# Altium PCB ArduinoUnoShield.PcbDoc
Units mil, origin at the board's own origin, x right, y up, seen from the top; angles counter-clockwise.
Board outline 2700 x 2100 mil, 2 copper layers (Top Layer, Bottom Layer); 21 components, 38 nets, 83 pads, 0 vias.
Unrouted connection lines stored in the file: 2.
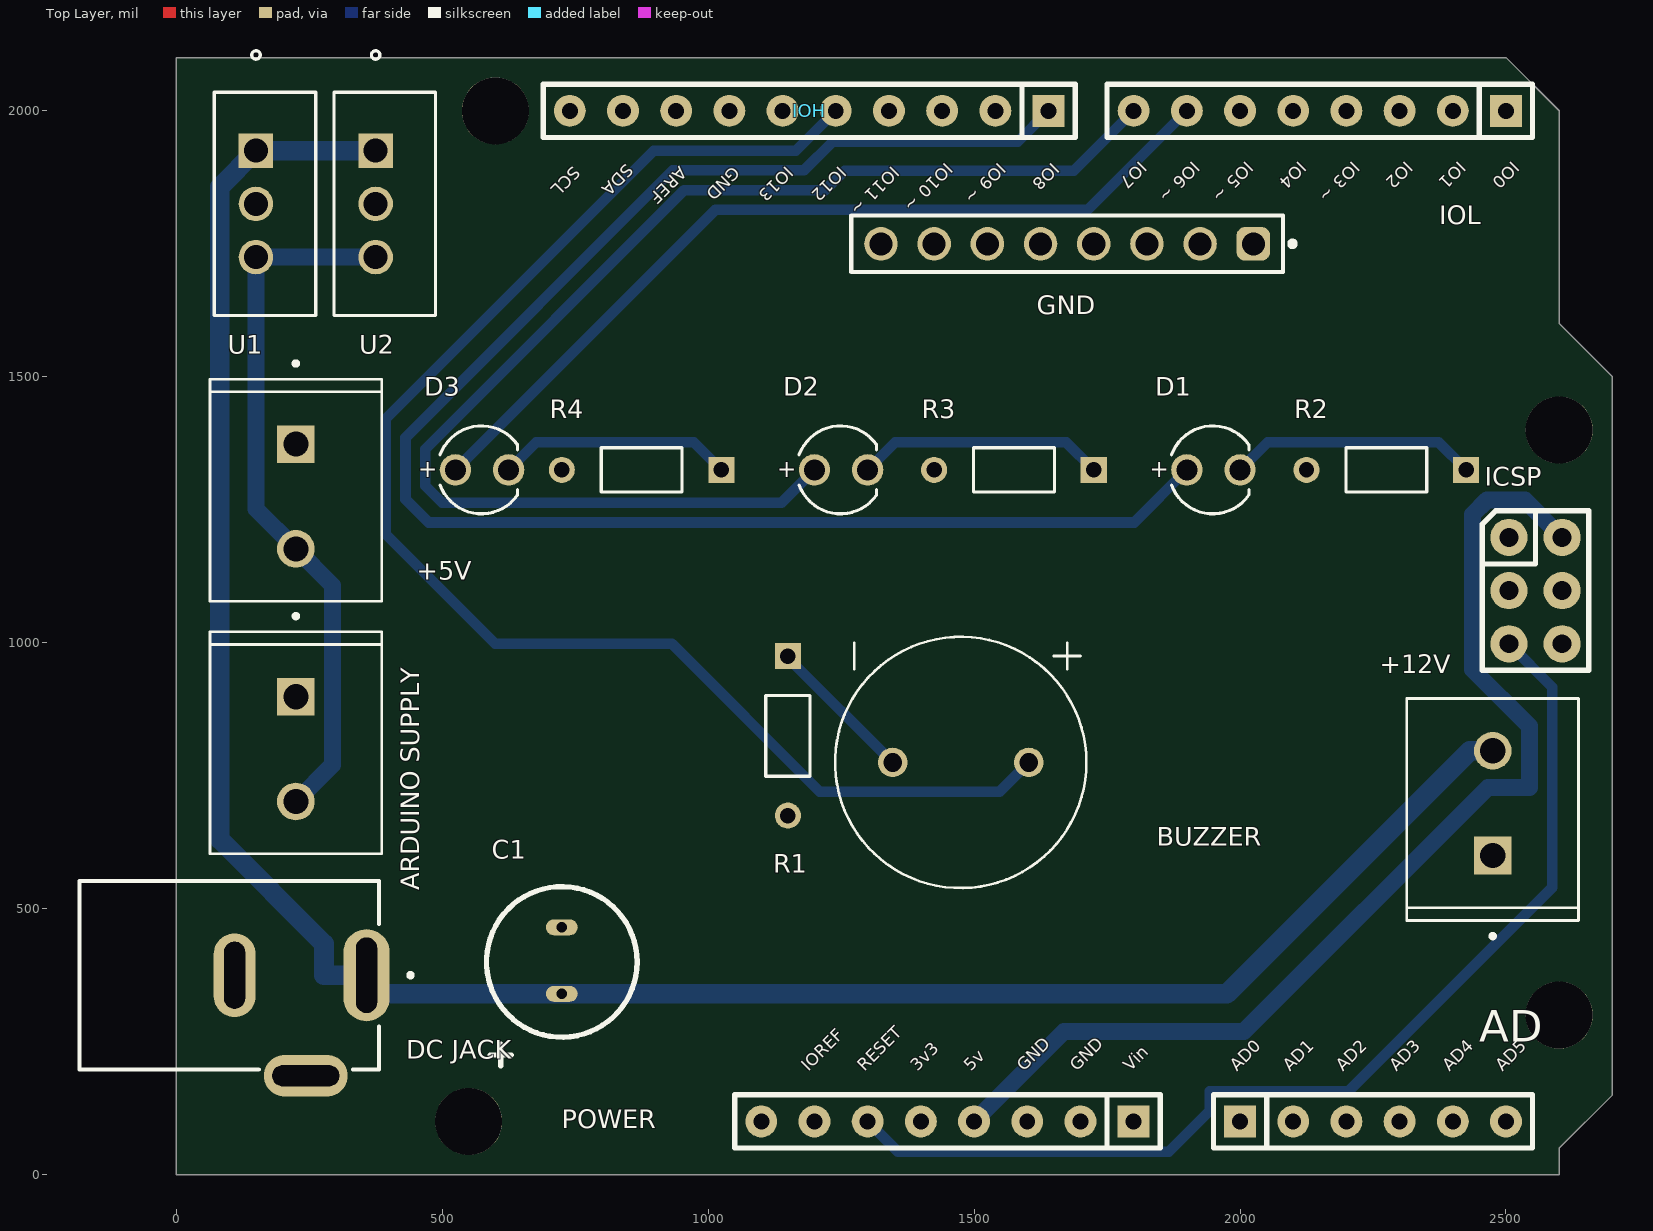
[diagram p0: Top Layer view]
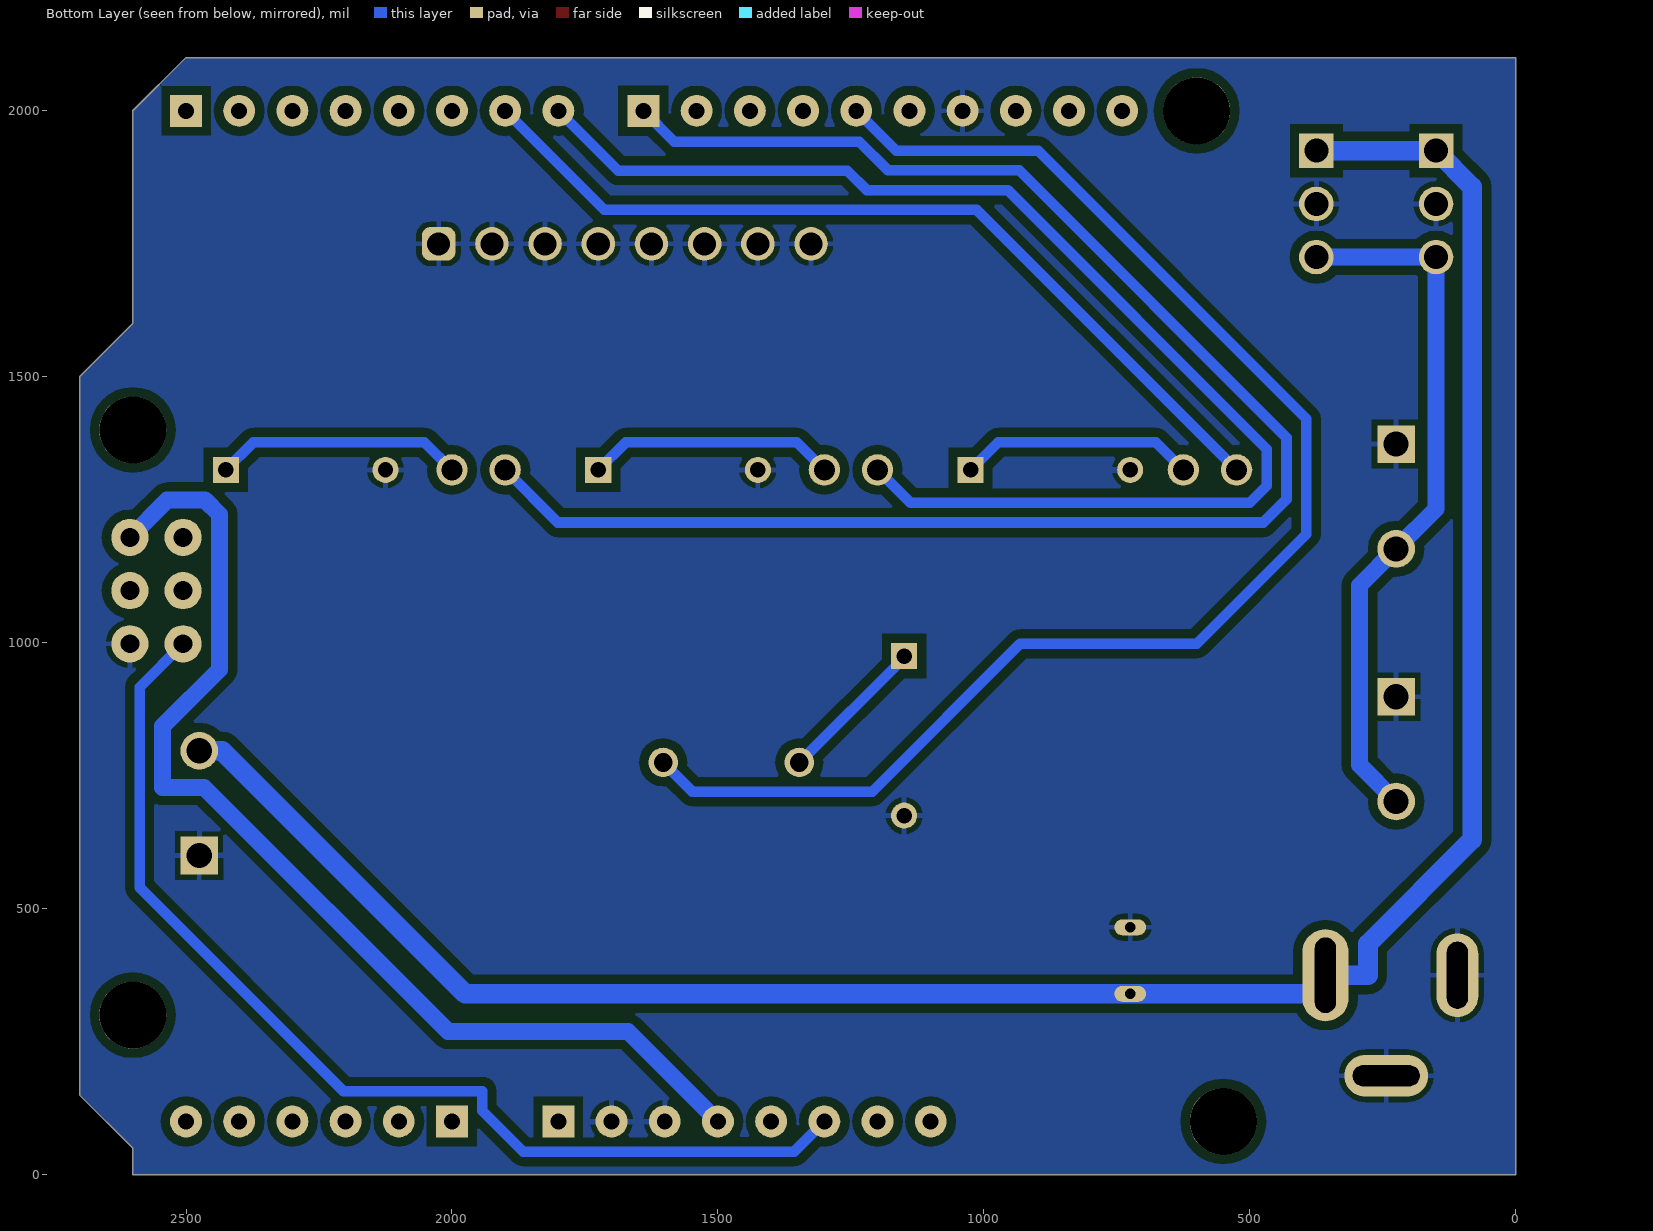
[diagram p1: Bottom Layer view, seen from below]
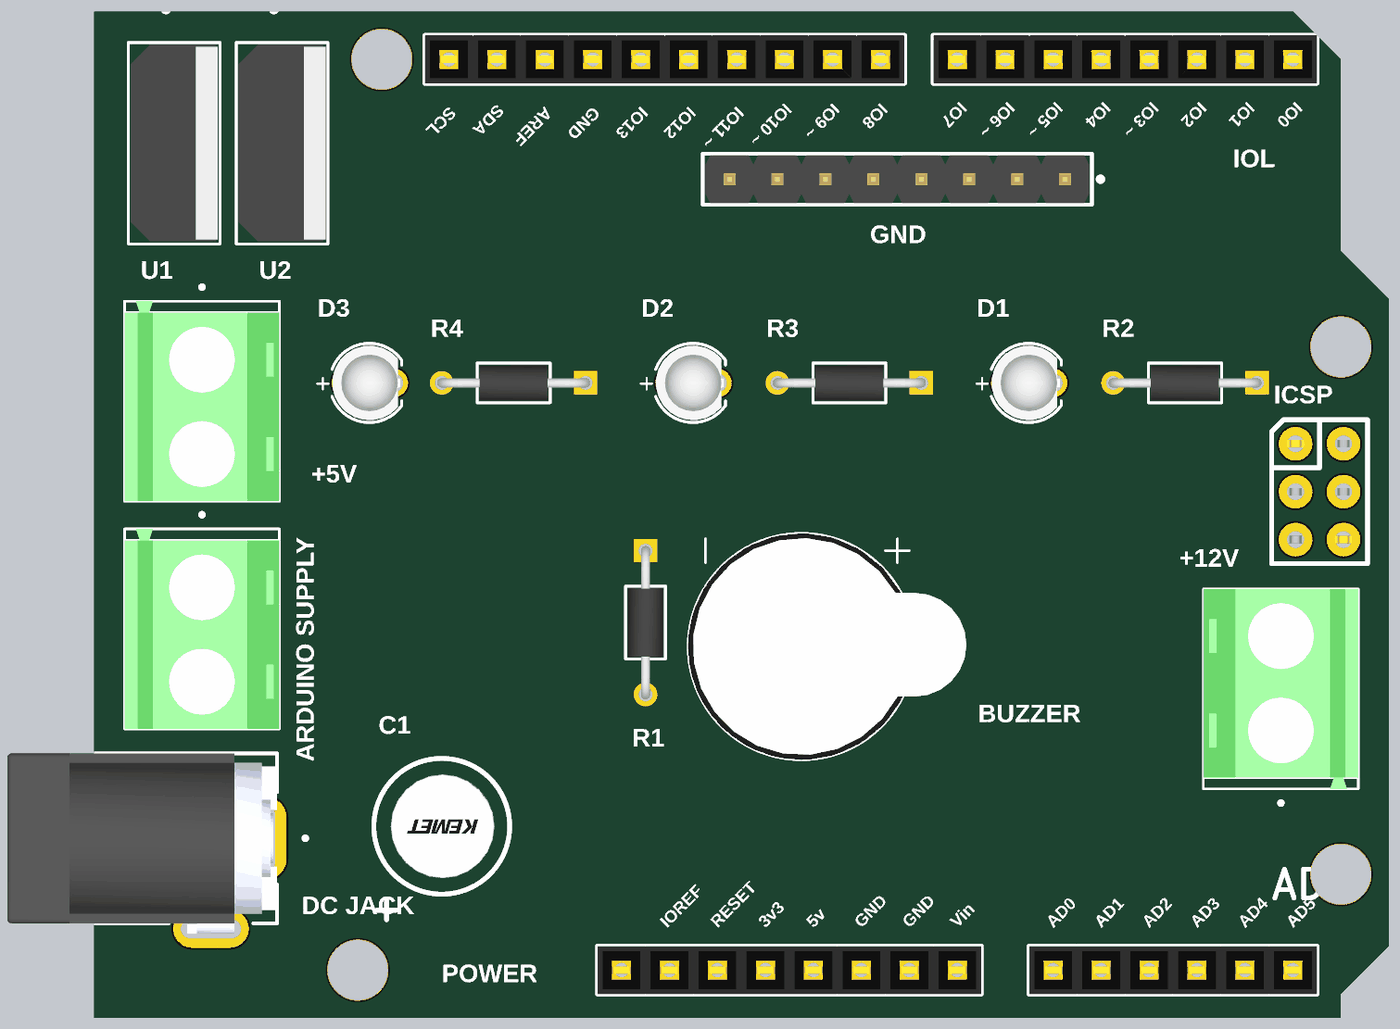
[diagram p2: 3D render of the assembled board from above, using the file's embedded part models]

## Layer stack, top to bottom
Top Solder: solder mask 0.4, Solder Resist, Dk 3.5
Top Layer: signal copper 1.4
Dielectric1: dielectric 12.6, FR-4, Dk 4.8
Bottom Layer: signal copper 1.4
Bottom Solder: solder mask 0.4, Solder Resist, Dk 3.5

## Board outline
0,0 0,2100 2500,2100 2600,2000 2600,1600 2700,1500 2700,150 2600,50 2600,0

## Design rules (kind name [scope] priority, off if disabled: settings)
Clearance [All] p1: gap=17 ignorepadtopadclearanceinfootprint=TRUE
PolygonConnect [All] p1: connectstyle=Relief reliefconductorwidth=10 reliefentries=4 polygonreliefangle="90 Angle" airgapwidth=10
RoutingLayers [All] p1: top layer_v5=FALSE bottom layer_v5=TRUE
RoutingVias [All] p1: holewidth=28 width=50 viastyle="Through Hole" minholewidth=28 minwidth=50 maxholewidth=28 maxwidth=50
SilkToSolderMaskClearance SilkscreenOverComponentPads [IsPad] p1: minsilkscreentomaskgap=10 clearancetoexposedcopper=TRUE
SolderMaskExpansion [All] p1: expansion=4 istentingtop=FALSE
Width Width_12V&GND [(InNet('+12') OR InNet('GND') OR InNet('3V3'))] p1: maxlimit=40 minlimit=35 preferedwidth=37
Width Width_5V&3.3V [(InNet('3V3') OR InNet('+5') OR InNet('+5_REG2MPU') OR InNet('5V'))] p2: maxlimit=35 minlimit=30 preferedwidth=32
Width [All] p3: maxlimit=25 minlimit=18 preferedwidth=20
28 further rules are at their usual default settings.

## Components (designator, comment, footprint, x,y, rotation, side; value= is the part's Value field where it differs from the comment)
+5V "282836-2" TE_282836-2 225,1275 r270 top (schematic designator J3)
+12V "282836-2" TE_282836-2 2475,698.42 r90 top (schematic designator J4)
AD "AD" "Header 6x1 8.5mm" 2000,100 r0 top locked
"ARDUINO SUPPLY" "282836-2" TE_282836-2 225,800 r270 top (schematic designator J1)
BUZZER "AT-1224-TWT-5V-2-R" BUZZER 1475,775 r270 top value="BUZZER MAGNETIC 5V 12MM TH" (schematic designator LS1)
C1 "ESK475M035AC3AA" "CAP THT ELECTROLYTIC" 725,400 r90 top value="4.7 µF 35 V Aluminum Electrolytic Capacitors Radial, Can 2000 Hrs @ 85°C"
D1 "Blue, 3.2V, 40°" "LED THROUGH HOLE" 1950,1325 r0 top value="LED GREEN DIFFUSED 3MM ROUND T/H"
D2 "Blue, 3.2V, 40°" "LED THROUGH HOLE" 1250,1325 r0 top value="LED GREEN DIFFUSED 3MM ROUND T/H"
D3 "Blue, 3.2V, 40°" "LED THROUGH HOLE" 575,1325 r0 top value="LED GREEN DIFFUSED 3MM ROUND T/H"
"DC JACK" "DCJ200-10-A-XX-K_REVA" "DC POWER JACK" 100,375 r270 top (schematic designator J2)
GND "61300811121" "8 PIN HEADER" 1675,1750 r180 top (schematic designator P1)
ICSP "ICSP" ICSP 2505.51,1198.03 r0 top locked
IOH "IOH" "Header 10x1 8.5mm" 1640,2000 r180 top locked
IOL "IOL" "Header 8x1 8.5mm" 2500,2000 r180 top locked
POWER "POWER_UNO" "Header 8x1 8.5mm" 1800,100 r180 top locked
R1 "RNMF14FTC200R" "RESISTOR THROUGH HOLE" 1150,975 r270 top value="RES 200 OHM 1% 1/4W AXIAL"
R2 "RNMF14FTC200R" "RESISTOR THROUGH HOLE" 2425,1325 r180 top value="RES 200 OHM 1% 1/4W AXIAL"
R3 "RNMF14FTC200R" "RESISTOR THROUGH HOLE" 1725,1325 r180 top value="RES 200 OHM 1% 1/4W AXIAL"
R4 "RNMF14FTC200R" "RESISTOR THROUGH HOLE" 1025,1325 r180 top value="RES 200 OHM 1% 1/4W AXIAL"
U1 "L7805CV" "7805 REG" 150,1925 r270 top value="IC REG LINEAR 5V 1.5A TO220AB"
U2 "L7805CV" "7805 REG" 375,1925 r270 top value="IC REG LINEAR 5V 1.5A TO220AB"

## Footprints (in the part's own frame and the unit in brackets; to place one, negate y for a bottom-side part, rotate by r counter-clockwise, add the part's x,y. Pads: shape width x height; smd on the part's side, far side on the other; paste and mask are expansions set on the pad)
"8 PIN HEADER" [mm] "Pin Header, pitch 2.54 mm, THT, Vertical, single row, 8p"
  rrect50% 1.6x1.6 hole 1.1: 1(-8.89,0)
  round 1.6 hole 1.1: 2(-6.35,0) 3(-3.81,0) 4(-1.27,0) 5(1.27,0) 6(3.81,0) 7(6.35,0) 8(8.89,0)
  silkscreen extent -10.88,-1.34 10.31,1.34, body extent -10.16,-1.27 10.16,1.27, height 8.57
"7805 REG" [mil]
  rect 65x65 / inner round 60 / far side rect 65x65 hole 45 paste-32.5 mask-32.5: 1(0,0)
  round 65 / inner round 60 / far side round 65 hole 45 paste-32.5 mask-32.5: 2(100,0) 3(200,0)
  silkscreen extent -188,-79 310,113, body extent -105,-74 305,108, height 776
BUZZER [mm]
  round 1.408 hole 0.9: N(0,-3.25) P(0,3.25)
  silkscreen extent -6,-6 6,6, body extent -6,-6.01 6,8.74, height 10.16
"CAP THT ELECTROLYTIC" [mil]
  oval 30x60 hole 20: 1(-60,0) 2(65,0)
  silkscreen extent -195,-142 142,141, body extent -108,-110 108,107, height 550
"DC POWER JACK" [mm]
  oval 4.4x2.2 hole 1 slot 3.6 at 0 deg: 1(0,6.55)
  oval 4x2 hole 1 slot 3.2 at 0 deg: 2(0,0.25)
  oval 2x4 hole 1 slot 3.2 at 90 deg: 3(4.8,3.65)
  silkscreen extent -4.5,-7.15 4.5,8.75, body extent -4.5,-7.15 5.05,7.15, height 11
"Header 6x1 8.5mm" [mil] "Stackable 6 pin header"
  rect 60x60 hole 30: 1(0,0)
  round 60 hole 30: 2(100,0) 3(200,0) 4(300,0) 5(400,0) 6(500,0)
  silkscreen extent -50,-50 550,50, body extent -50,-50 550,50, height 335
"Header 8x1 8.5mm" [mil] "Stackable 8 pin header"
  rect 60x60 hole 30: 1(0,0)
  round 60 hole 30: 2(100,0) 3(200,0) 4(300,0) 5(400,0) 6(500,0) 7(600,0) 8(700,0)
  silkscreen extent -50,-50 750,50, body extent -50,-50 750,50, height 335
"Header 10x1 8.5mm" [mil] "Stackable 10 pin header"
  rect 60x60 hole 30: 1(0,0)
  round 60 hole 30: 2(100,0) 3(200,0) 4(300,0) 5(400,0) 6(500,0) 7(600,0) 8(700,0) 9(800,0) 10(900,0)
  silkscreen extent -50,-50 950,50, body extent -50,-50 950,50, height 335
ICSP [mil]
  round 70 hole 35.43: 1(0,0) 2(100,0) 3(0,-100) 4(100,-100) 5(0,-200) 6(100,-200)
  silkscreen extent -50,-250 150,50, body extent -50,-250 150,50, height 485
"LED THROUGH HOLE" [mm] "THT Mono-color Round Color LED, 2-leads"
  round 1.5 hole 1: 1(-1.27,0) 2(1.27,0)
  silkscreen extent -2,-2.1 1.69,2.1, body extent -1.99,-1.97 1.63,1.97, height 5.35
"RESISTOR THROUGH HOLE" [mil]
  rect 49x49 / inner round 60 / far side rect 49x49 hole 29 paste-24.5 mask+0: 1(0,0)
  round 49 / inner round 60 / far side round 49 hole 29 paste-24.5 mask+0: 2(300,0)
  silkscreen extent 74,-41 226,42, body extent -9,-36 309,36, height 73
TE_282836-2 [mm]
  rect 1.8x1.8 / inner round 1.8 / far side rect 1.8x1.8 hole 1.2: 1(-2.5,0)
  round 1.8 hole 1.2: 2(2.5,0)
  silkscreen extent -6.45,-4.1 5,4.1, body extent -5.6,-4.1 5,4.1, height 10

## Part data
+5V +12V "ARDUINO SUPPLY": "Terminal Block Connector Wire Receptacle 2 5 mm 30-16 AWG Green 13.5 A 300 V", Package=None, Check_prices=https://www.snapeda.com/parts/282836-2/TE+Connectivity+AMP+Connectors/view-part/?ref=eda, Digikey link=https://www.digikey.com/en/products/detail/te-connectivity-amp-connectors/282836-2/1826939, MF="TE Connectivity", MP=282836-2, PIN=282836-2, SnapEDA_Link=https://www.snapeda.com/parts/282836-2/TE+Connectivity+AMP+Connectors/view-part/?ref=snap
AD: Supplier Part Number 1=2699089, Supplier 1=Arrow, Supplier 2=Digi-Key, Supplier 3=Arrow, Supplier 4=Arrow, Supplier Part Number 2=SAM1198-06-ND, Supplier Part Number 3=2699088, Supplier Part Number 4=2699075
BUZZER: "Buzzers Transducer, Externally Driven Magnetic 5 V 50mA 2.4kHz 87dB @ 5V, 10cm Through Hole PC Pins", Package=None, Availability=Unavailable, Digikey link=https://www.digikey.com/en/products/detail/soberton-inc/WT-1205/479674, MP=AT-1224-TWT-5V-2-R, PIN=WT-1205, Price=None
C1: "CAP ALUM 4.7UF 20% 35V RADIAL TH", Digikey link=https://www.digikey.com/en/products/detail/kemet/ESK475M035AC3AA/13176259, PIN=ESK475M035AC3AA
D1 D2 D3: library part 151051BS04000, "WL-TMRC Mono-color Round Color, THT, D5.9 x H8.7mm, Blue, 3.2V, 40°", Case/Size Code=5mm, Emitting Color=Blue, Forward Voltage=3.2V, Manufacturer="Wurth Elektronik", Operating Temperature Max=85°C, Operating Temperature Min=-40°C, Category="Signal LEDs", Chip Technology=GaN, ComponentLink1Description="Website Link", ComponentLink1URL=https://www.we-online.com/redexpert/article/151051BS04000?ad, ComponentLink2Description="Datasheet Link", ComponentLink2URL=https://www.we-online.com/redexpert/spec/151051BS04000?ad, Diameter=5.9mm, Digikey link=https://www.digikey.com/en/products/detail/w%C3%BCrth-elektronik/151031VS06000/4489988, Dominant Wavelength=470nm, Height=8.7mm, Luminous Intensity=500mcd, Manufacturer Part Number=151051BS04000, Match Code=WL-TMRC, Mount="Through Hole", Packaging=Bulk, Peak Wavelength=465nm, PIN=151031VS06000, Viewing Angle=40°
"DC JACK": "Power Barrel Connector Jack 2.05mm ID (0.081), 5.50mm OD (0.217) Through Hole, Right Angle", Package=None, Check_prices=https://www.snapeda.com/parts/DCJ200-10-A-K1-K/Global+Connector+Technology/view-part/?ref=eda, MF="Global Connector Technology", MP=DCJ200-10-A-K1-K, SnapEDA_Link=https://www.snapeda.com/parts/DCJ200-10-A-K1-K/Global+Connector+Technology/view-part/?ref=snap
GND: "WR-PHD Pin Header, THT, Vertical, pitch 2.54mm, 1 Row, 8P", Contact Resistance=20mOhm, Manufacturer="Wurth Elektronik", Operating Temperature Max=105°C, Operating Temperature Min=-40°C, Rated Current=3A, Withstanding Voltage=500V, Working Voltage=250V, Category="Board-to-Board Connectors", ComponentLink1Description="Website Link", ComponentLink1URL=https://www.we-online.com/redexpert/article/61300811121?ad, ComponentLink2Description="Datasheet Link", ComponentLink2URL=https://www.we-online.com/redexpert/spec/61300811121?ad, Gender="Pin Header", Manufacturer Part Number=61300811121, Match Code=WR-PHD, Mount="Through Hole", Number of Pins=8, Number of Rows=1, Orientation=Vertical, Packaging=Bag, Pitch=2.54mm
ICSP: Supplier Part Number 1=2699117, Supplier 1=Arrow, Supplier 2=Arrow, Supplier 3=Digi-Key, Supplier 4=Arrow, Supplier 5=Digi-Key, Supplier Part Number 2=2699116, Supplier Part Number 3=SAM1185-06-ND, Supplier Part Number 4=2699091, Supplier Part Number 5=SAM1196-06-ND
IOH: Supplier Part Number 1=2698803S4475693N1004, Supplier 1=Arrow, Supplier 2=Digi-Key, Supplier 3=Arrow, Supplier Part Number 2=SAM1198-10-ND, Supplier Part Number 3=2698789
IOL POWER: Supplier Part Number 1=SAM1198-08-ND, Supplier 1=Digi-Key, Supplier 2=Arrow, Supplier 3=Arrow, Supplier 4=Arrow, Supplier Part Number 2=2698939, Supplier Part Number 3=2698940, Supplier Part Number 4=2698925
R1 R2 R3 R4: "200 Ohms ±1% 0.25W, 1/4W Through Hole Resistor Axial Flame Retardant Coating, Safety Metal Film", Mfr_Name="Stackpole International", Digikey link=https://www.digikey.com/en/products/detail/stackpole-electronics-inc/RNMF14FTC200R/2617310, PIN=RNMF14FTC200R
U1 U2: "Linear Voltage Regulator IC Positive Fixed 1 Output 1.5A TO-220", Mfr_Name=STMicroelectronics, Digiky link=https://www.digikey.com/en/products/detail/stmicroelectronics/L7805CV/585964, PIN=L7805CV, RefDes=RefDes, Type=Type

## Free pads (board coordinates)
  round 125.98 hole 125.98: 0(550,100) 0(600,2000) 0(2600,300) 0(2600,1400)

## Nets (pads, with @x,y where several pads share a name; then routed paths per layer and width w, separated by ;. In a path a pad name is that pad's centre, name@x,y a point inside that pad or via, vN(x,y) a via of type N, cw(c..) or ccw(c..) an arc to the next point about the centre after c; other vN are vias at no path point)
3V3: POWER.5
5V: ICSP.2 POWER.4 | length 2070.1
  Bottom Layer w32: POWER.4 1669,269 2007,269 2466,728 2544,728 2544,843 2437,950 2437,1241 2464,1268 2535.54,1268 ICSP.2
+5_REG2MPU: "ARDUINO SUPPLY.2" +5V.2 U1.3 U2.3 | length 1336.7
  Bottom Layer w32: 225,701.57 294,770.57 294,1107.57 +5V.2 150,1251.57 U1.3 U2.3
+12: "DC JACK.1" +12V.2 C1.1 U1.1 U2.1 | length 4305.6
  Bottom Layer w37: U2.1 U1.1 82,1857 82,630 278,434 278,375 357.87,375 357.87,340 C1.1 1975.07,340 2431.92,796.85 +12V.2
AD0: AD.1
AD1: AD.2
AD2: AD.3
AD3: AD.4
AD4: AD.5
AD5: AD.6
AREF: IOH.8
GND: "ARDUINO SUPPLY.1" "DC JACK.2" "DC JACK.3" +5V.1 +12V.1 C1.2 GND.1 GND.2 GND.3 GND.4 GND.5 GND.6 GND.7 GND.8 ICSP.6 IOH.7 POWER.2 POWER.3 R1.2 R2.2 R3.2 R4.2 U1.2 U2.2
IO0: IOL.1
IO1: IOL.2
IO2: IOL.3
IO3: IOL.4
IO4: IOL.5
IO5: IOL.6
IO6: D3.1 IOL.7 | length 1654.6
  Bottom Layer w20: D3.1 1014,1814 1714,1814 IOL.7
IO7: D2.1 IOL.8 | length 2435.4
  Bottom Layer w20: D2.1 1138,1263 500,1263 468,1295 468,1364 955,1851 1220.5,1851 1257,1887.5 1687.5,1887.5 IOL.8
IO8: D1.1 IOH.1 | length 3107.2
  Bottom Layer w20: IOH.1 1582,1942 1234.33,1942 1180.33,1888 933.67,1888 431,1385.33 431,1270 475,1226 1801,1226 D1.1
IO9: IOH.2
IO10: IOH.3
IO11: IOH.4
IO12: BUZZER.P IOH.5 | length 2735
  Bottom Layer w20: IOH.5 1165,1925 898,1925 394,1421 394,1204 600,998 932,998 1210,720 1547.95,720 BUZZER.P
IO13: IOH.6
IOREF: POWER.7
MISO: ICSP.1
MOSI: ICSP.4
NetD1_2: D1.2 R2.1 | length 468.1
  Bottom Layer w20: D1.2 2052,1377 2373,1377 R2.1
NetD2_2: D2.2 R3.1 | length 468.1
  Bottom Layer w20: D2.2 1352,1377 1673,1377 R3.1
NetD3_2: D3.2 R4.1 | length 443.1
  Bottom Layer w20: D3.2 677,1377 973,1377 R4.1
NetLS1_N: BUZZER.N R1.1 | length 281.6
  Bottom Layer w20: R1.1 1150,972.05 BUZZER.N
RESET: ICSP.5 POWER.6 | length 2029.9
  Bottom Layer w20: POWER.6 1357,43 1866,43 1943,120 1943,157 2204,157 2587,540 2587,916.54 ICSP.5
SCK: ICSP.3
SCL: IOH.10
SDA: IOH.9
VIN: POWER.1
pads on no net: POWER.8

## Polygon pours and split planes (outlines as drawn)
GND on Bottom Layer "GND_L02_P001" (solid, pour order 1): 0,0 0,2100 2500,2100 2600,2000 2600,1600 2700,1500 2700,150 2600,50 2600,0

## Silkscreen, mask and mechanical layers (free items; w line width, h text height)
Top Overlay:
  text "IO7" at 1805,1912.93 h40 r225
  text "IO6 ~" at 1905,1912.93 h40 r225
  text "IO5 ~" at 2005,1912.93 h40 r225
  text "IO4" at 2105,1912.93 h40 r225
  text "IO3 ~" at 2205,1912.93 h40 r225
  text "IO2" at 2305,1912.93 h40 r225
  text "IO1" at 2405,1912.93 h40 r225
  text "IO0" at 2505,1912.93 h40 r225
  text "IO10 ~" at 1440,1910 h40 r225
  text "IO9 ~" at 1540,1910 h40 r225
  text "IO8" at 1640,1910 h40 r225
  text "SDA" at 840,1907.93 h40 r225
  text "SCL" at 740,1902.93 h40 r225
  text "AREF" at 940,1902.93 h40 r225
  text "GND" at 1040,1902.93 h40 r225
  text "IO13" at 1140,1902.93 h40 r225
  text "IO12" at 1240,1902.93 h40 r225
  text "IO11 ~" at 1340,1902.93 h40 r225
  text "IOREF" at 1195,187.07 h40 r45
  text "RESET" at 1300,187.07 h40 r45
  text "3v3" at 1400,187.07 h40 r45
  text "5v" at 1500,187.07 h40 r45
  text "GND" at 1600,187.07 h40 r45
  text "GND" at 1700,187.07 h40 r45
  text "Vin" at 1800,187.07 h40 r45
  text "AD0" at 2000,187.07 h40 r45
  text "AD1" at 2100,187.07 h40 r45
  text "AD2" at 2200,187.07 h40 r45
  text "AD3" at 2300,187.07 h40 r45
  text "AD4" at 2400,187.07 h40 r45
  text "AD5" at 2500,187.07 h40 r45
  text "RESET" at 1295,-2515 h40 r45
  text "3v3" at 1395,-2515 h40 r45
  text "5v" at 1495,-2515 h40 r45
  text "GND" at 1595,-2515 h40 r45
  text "GND" at 1695,-2515 h40 r45
  text "Vin" at 1795,-2515 h40 r45
Mechanical 1:
  circle w5: c600,2000 r62.99
  circle w5: c2600,300 r62.99
  circle w5: c550,100 r62.99
  circle w5: c2600,1400 r62.99
  lines w5: 0,0 0,2100 2500,2100 2600,2000 2600,1600 2700,1500 2700,150 2600,50 2600,0 0,0

## Text inside footprints (layer, text, board x,y; h text height)
D1: Top Overlay "+" at 1829.92,1311.22 h31.5
D2: Top Overlay "+" at 1129.92,1311.22 h31.5
D3: Top Overlay "+" at 454.92,1311.22 h31.5